# Altium PCB Amp_Lm386.PcbDoc
Units mm, origin at the board's own origin, x right, y up, seen from the top; angles counter-clockwise.
Board outline 47.75 x 47.62 mm, 2 copper layers (Top Layer, Bottom Layer); 14 components, 13 nets, 41 pads, 0 vias.
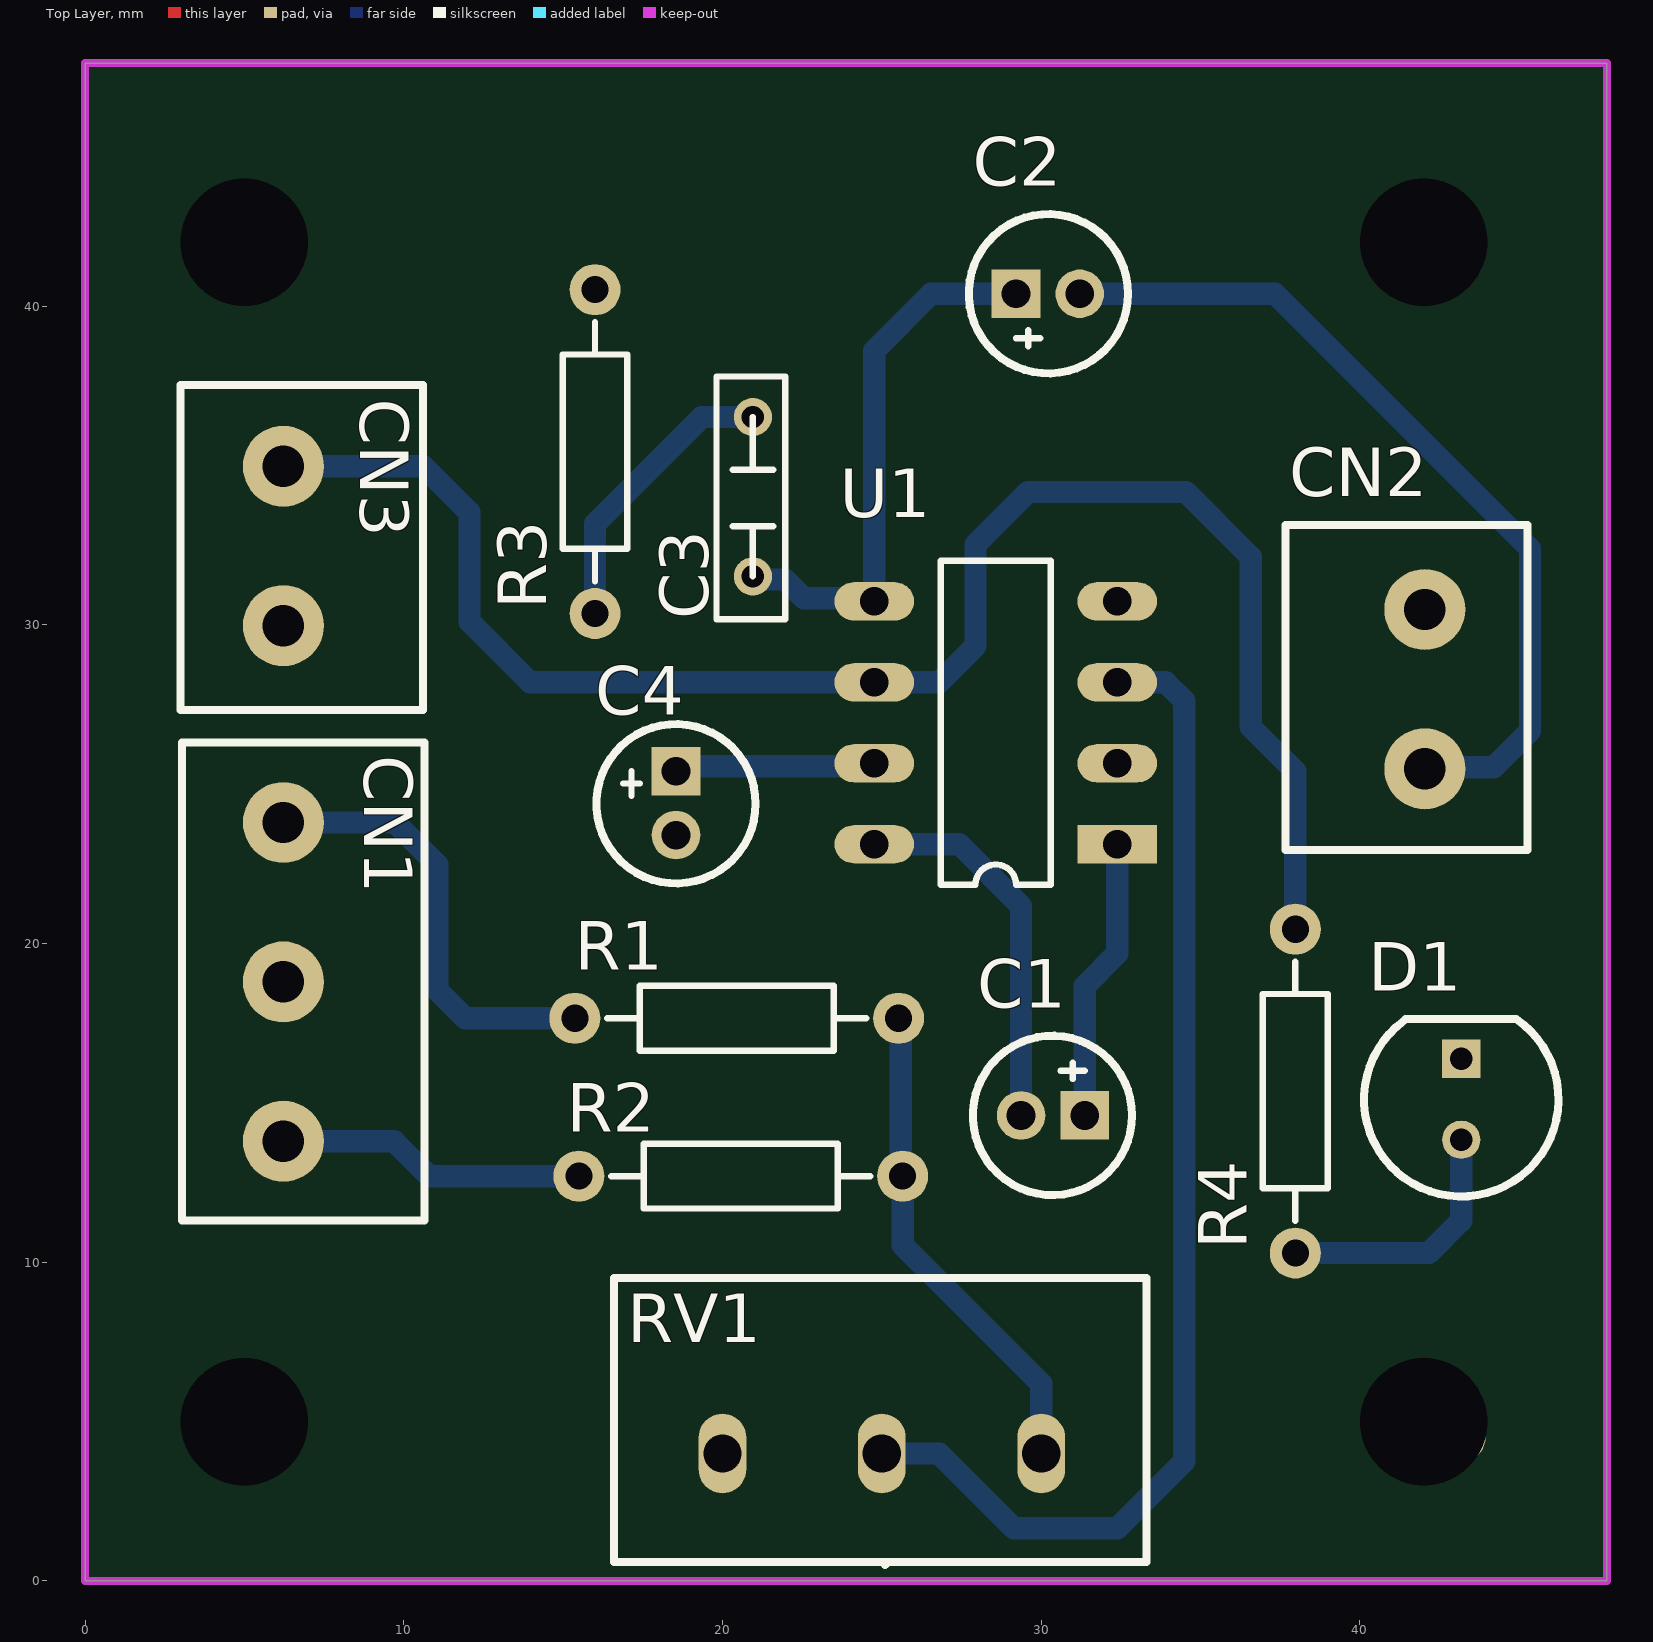
[diagram p0: Top Layer view]
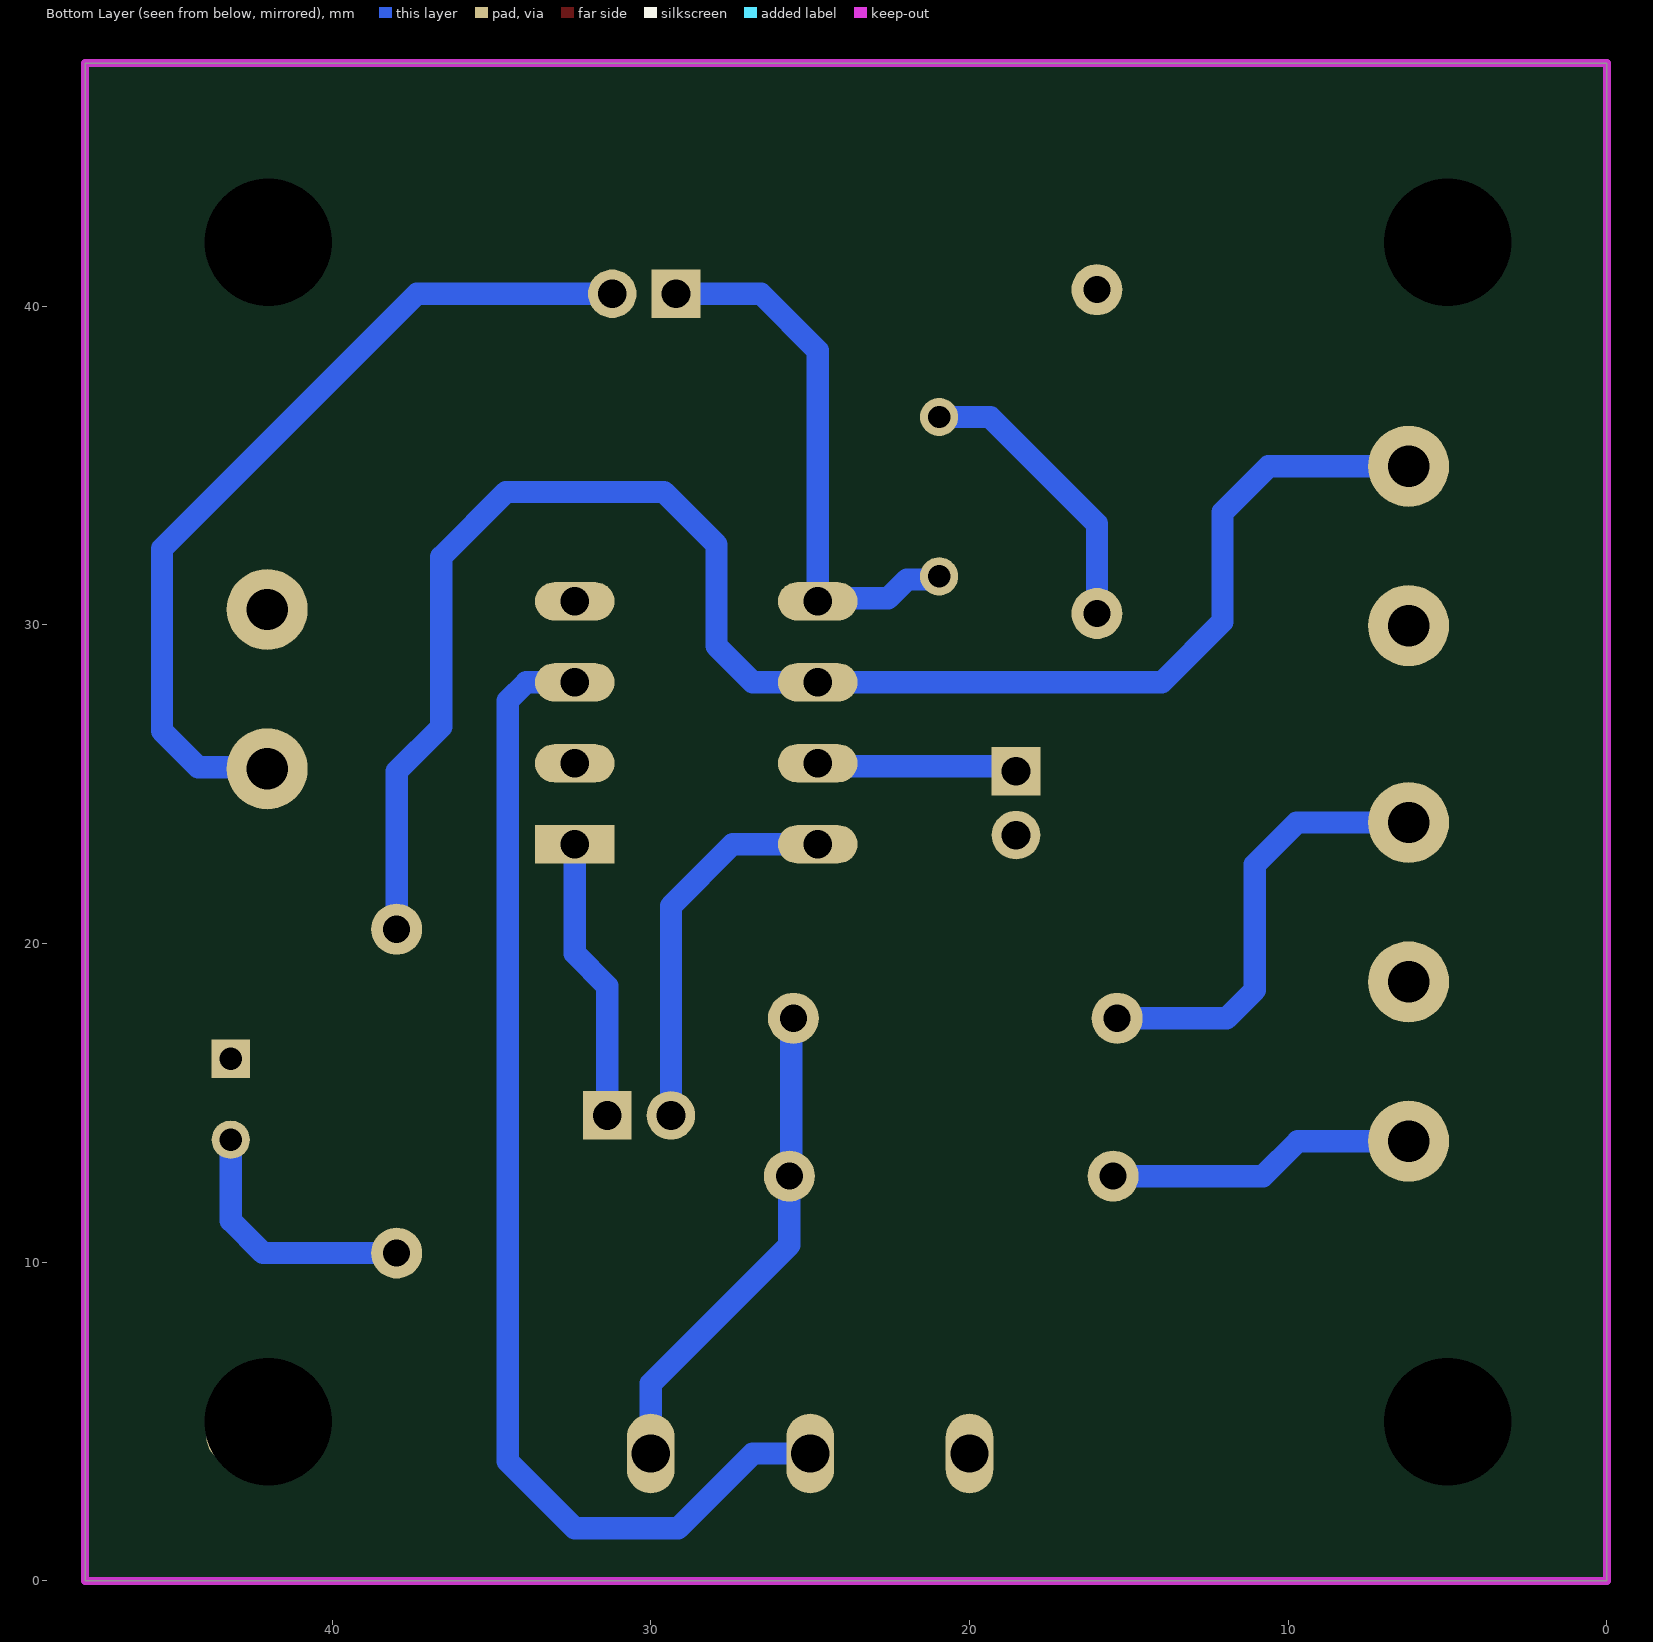
[diagram p1: Bottom Layer view, seen from below]

## Layer stack, top to bottom
Top Solder: solder mask 0.0102, Solder Resist, Dk 3.5
Top Layer: signal copper 0.0356
Dielectric 1: dielectric 0.32, FR-4, Dk 4.8
Bottom Layer: signal copper 0.0356
Bottom Solder: solder mask 0.0102, Solder Resist, Dk 3.5

## Board outline
0,0 0,47.625 47.752,47.625 47.752,0

## Design rules (kind name [scope] priority, off if disabled: settings)
Clearance [All] p1: gap=0.5 ignorepadtopadclearanceinfootprint=TRUE
HoleSize [All] p1: absolutevalues=TRUE maxlimit=5 minlimit=0.025 maxpercent=80.000 minpercent=20.000
PolygonConnect [All] p1: connectstyle=Relief reliefconductorwidth=0.5 reliefentries=4 polygonreliefangle="90 Angle" airgapwidth=0.5
RoutingVias [All] p1: holewidth=0.7 width=1.2 viastyle="Through Hole" minholewidth=0.5 minwidth=1 maxholewidth=5 maxwidth=5
SolderMaskExpansion [All] p1: expansion=0.102
Width [All] p1: maxlimit=0.7 minlimit=0.7 preferedwidth=0.7 minimp=50.000000 maximp=50.000000 favimp=50.000000
29 further rules are at their usual default settings.

## Classes and differential pairs
component class Amp_Lm386: C1 C2 C3 C4 CN1 CN2 CN3 R1 R2 RV1 U1

## Components (designator, comment, footprint, x,y, rotation, side; value= is the part's Value field where it differs from the comment)
C1 "10uF" Cap_1 31.369,14.605 r180 top
C2 "250uF" Cap_1 29.21,40.386 r0 top
C3 "100nF" CAP_DISC 20.955,36.519 r270 top
C4 "10uF" Cap_1 18.542,25.4 r270 top
CN1 "H3" H3 3.048,26.311 r270 top
CN2 "H2" H2 42.012,25.505 r90 top
CN3 "H2" H2 6.248,34.947 r270 top
D1 "LED" LED_GREEN 43.18,13.843 r90 top
R1 "1K" Resistor 27.813,20.066 r180 top
R2 "1K" Resistor 27.94,15.113 r180 top
R3 "10R" Resistor 13.589,42.799 r270 top
R4 "10K" Resistor 40.386,8.001 r90 top
RV1 "10K" "POT PTH VERTICAL" 30,4 r180 top
U1 "LM386" LM386 32.385,23.114 r180 top

## Footprints (in the part's own frame and the unit in brackets; to place one, negate y for a bottom-side part, rotate by r counter-clockwise, add the part's x,y. Pads: shape width x height; smd on the part's side, far side on the other; paste and mask are expansions set on the pad)
Cap_1 [mil]
  rect 60x60 hole 35.43: 1(0,0)
  round 60 hole 35.43: 2(78.74,0)
  silkscreen extent -58,-98 138,98, body extent -59,-99 139,99, height 454
CAP_DISC [mm]
  round 1.2 hole 0.7: 1(0,0) 2(5,0)
  silkscreen extent -1.27,-1.14 6.35,1.02, body extent -0.96,-0.85 6.04,0.85, height 7.5
H2 [mm]
  round 2.54 hole 1.3: 1(-0.025,-0.025) 2(4.975,-0.025)
  silkscreen extent -2.58,-3.25 7.62,4.35, body extent -3.08,-3.38 7.53,4.23, height 10
H3 [mm]
  round 2.54 hole 1.3: 1(2.515,3.175) 2(7.515,3.175) 3(12.515,3.175)
  silkscreen extent 0,0 15,7.6, body extent -0.59,-0.18 15.01,7.42, height 10
LED_GREEN [mm]
  round 1.2 hole 0.7: A(0,0)
  rect 1.2x1.2 hole 0.7: K(2.54,0)
  silkscreen extent -1.78,-3.05 3.79,3.05, body extent -1.73,-3 3.77,3, height 9.94
LM386 [mm]
  rect 2.5x1.2 hole 0.9: 1(0,0)
  oval 2.5x1.2 hole 0.9: 2(0,-2.54) 3(0,-5.08) 4(0,-7.62) 5(7.62,-7.62) 6(7.62,-5.08) 7(7.62,-2.54) 8(7.62,0)
  silkscreen extent 2.08,-8.89 5.54,1.27, body extent -0.04,-9.5 7.84,1.93, height 4.19
"POT PTH VERTICAL" [mm]
  oval 1.5x2.5 hole 1.2: 1(0,0) 2(5,0) 3(10,0)
  silkscreen extent -3.3,-5.5 13.4,3.5, body extent -3.5,-6.3 13.5,23.5, height 22.5
Resistor [mm]
  round 1.6 hole 0.85: 1(2.286,2.413) 2(12.446,2.413)
  silkscreen extent 3.3,1.4 11.43,3.43, body extent 1.98,1.26 12.75,3.57, height 2.93

## Part data
C1 C4: library part Cap_Eletro1, "Capacitor Electrolytic", Case/Package=Radial, Manufacturer=Nichicon, Manufacturer Part Number=UCA2G100MPD1TD, Max Operating Temperature=105°C, Min Operating Temperature=-25°C, Package Quantity=500, Ripple Current=280mA, Supplier Part Number 1=493-4771-1-ND, Tolerance=20%, Voltage Rating=400V, Capacitance=10uF, ComponentLink1Description=https://datasheet.ciiva.com/6299/e-ca-6299384.pdf, ComponentLink1URL=https://datasheet.ciiva.com/6299/e-ca-6299384.pdf, Height - Seated (Max)=0.846inch, Lead Diameter=0.6mm, Lead Free="Lead Free", Lead Pitch=0.197inch, Life (Hours)=10000Hour, Mount="Through Hole", Packaging="Tape and Reel", Pricing 1="1=0.78, 10=0.573, 100=0.3927 (USD)", Stock 1=9403, Supplier 1=Digi-Key, Termination=Radial, Voltage Rating (DC)=400V
C2: library part Cap_Eletro1, "Capacitor Electrolytic", Capacitance=10uF, Case/Package=Radial, Manufacturer=Nichicon, Manufacturer Part Number=UCA2G100MPD1TD, Max Operating Temperature=105°C, Min Operating Temperature=-25°C, Package Quantity=500, Ripple Current=280mA, Supplier Part Number 1=493-4771-1-ND, Tolerance=20%, Voltage Rating=400V, ComponentLink1Description=https://datasheet.ciiva.com/6299/e-ca-6299384.pdf, ComponentLink1URL=https://datasheet.ciiva.com/6299/e-ca-6299384.pdf, Height - Seated (Max)=0.846inch, Lead Diameter=0.6mm, Lead Free="Lead Free", Lead Pitch=0.197inch, Life (Hours)=10000Hour, Mount="Through Hole", Packaging="Tape and Reel", Pricing 1="1=0.78, 10=0.573, 100=0.3927 (USD)", Stock 1=9403, Supplier 1=Digi-Key, Termination=Radial, Voltage Rating (DC)=400V
C3: library part Capacitor_Cerâmica, "Capacitor Disc Ceramic", Case/Package=Radial, Dielectric=Y5P, Manufacturer=Multicomp, Manufacturer Part Number=MCCC100V104KY5P, Max Operating Temperature=85°C, Min Operating Temperature=-30°C, Supplier Part Number 1=1600815, Tolerance=10%, Voltage Rating=100V, Capacitance=100nF, ComponentLink1Description=http://www.farnell.com/datasheets/1523828.pdf, ComponentLink1URL=http://www.farnell.com/datasheets/1523828.pdf, Number of Pins=2, Pricing 1="1=0.751, 10=0.343, 100=0.285, 500=0.2, 1000=0.172, 5000=0.15, 10000=0.134 (GBP)", REACH SVHC=Unknown, Stock 1=2845, Supplier 1=Farnell, Voltage Rating (DC)=100V
CN1: "KRE2/WD-128 3T", Colour=Blue, Current=15A, Flammability Rating="UL94 V-0", Manufacturer="On-Shore Technology", Manufacturer Part Number=OSTTA034163, Max Operating Temperature=105°C, Max Voltage Rating (AC)=300V, Min Operating Temperature=-30°C, Supplier Part Number 1=ED2581-ND, ComponentLink1Description=https://datasheet.ciiva.com/19454/152355-19454564.pdf, ComponentLink1URL=https://datasheet.ciiva.com/19454/152355-19454564.pdf, ComponentLink2Description=https://datasheet.ciiva.com/823/osttaxx4163-823578.pdf, ComponentLink2URL=https://datasheet.ciiva.com/823/osttaxx4163-823578.pdf, Contact Material=Brass,Steel, Contact Plating=Tin,Zinc, Depth=9mm, Height=13mm, Housing Colour=Blue, Housing Material=Thermoplastic, Lead Free="Contains Lead", Length=15.94mm, Max Current Rating=15A, Mount="Through Hole", Number of Contacts=3, Number of Levels=1, Number of Positions=3, Number of Positions Per Level=3, Number of Rows=1, Orientation=Straight, Packaging=Bulk, Pitch=0.2inch, Plating=Steel,Zinc, Pricing 1="1=1.08, 10=0.674, 25=0.5768, 50=0.5184, 100=0.5076, 250=0.432, 500=0.4104, 1000=0.3672, 5000=0.2873 (USD)", Stock 1=12938, Supplier 1=Digi-Key, Termination=Screw, Voltage=300V, Width=9mm, Wire Gauge (Max)=22AWG, Wire Gauge (Min)=14AWG
CN2 CN3: "KRE2/WD-128 2T", Colour=Blue, Current=15A, Flammability Rating="UL94 V-0", Manufacturer="On-Shore Technology", Manufacturer Part Number=OSTTA024163, Max Operating Temperature=105°C, Max Voltage Rating (AC)=300V, Min Operating Temperature=-30°C, Supplier Part Number 1=ED2580-ND, ComponentLink1Description=https://datasheet.ciiva.com/19454/152347-19454562.pdf, ComponentLink1URL=https://datasheet.ciiva.com/19454/152347-19454562.pdf, ComponentLink2Description=https://datasheet.ciiva.com/823/osttaxx4163-823567.pdf, ComponentLink2URL=https://datasheet.ciiva.com/823/osttaxx4163-823567.pdf, Contact Material=Brass,Steel, Contact Plating=Tin,Zinc, Depth=9mm, Height=13mm, Housing Colour=Blue, Housing Material=Thermoplastic, Lead Free="Lead Free", Length=10.86mm, Max Current Rating=15A, Mount="Through Hole", Number of Contacts=2, Number of Levels=1, Number of Positions=2, Number of Positions Per Level=2, Number of Rows=1, Orientation=Straight, Packaging=Bulk, Pitch=0.2inch, Plating=Steel,Zinc, Pricing 1="1=0.73, 10=0.452, 25=0.3872, 50=0.348, 100=0.3408, 250=0.29, 500=0.2755, 1000=0.2465, 5000=0.1929 (USD)", Stock 1=26493, Supplier 1=Digi-Key, Termination=Screw, Voltage=300V, Width=9mm, Wire Gauge (Max)=22AWG, Wire Gauge (Min)=14AWG
D1: library part LED-GREEN, "Light Emissor Diode - 5mm", Case/Package=Radial, Colour=Green, Forward Current=25mA, Forward Voltage=1.9V, Manufacturer=Kingbright, Manufacturer Part Number=WP7113LGD, Max Operating Temperature=85°C, Min Operating Temperature=-40°C, Package Quantity=1000, Supplier Part Number 1=754-1265-ND, Test Current=2mA, ComponentLink1Description=https://datasheet.ciiva.com/16510/wp7113lgd-16510240.pdf, ComponentLink1URL=https://datasheet.ciiva.com/16510/wp7113lgd-16510240.pdf, ComponentLink2Description=https://datasheet.ciiva.com/4692/wp7113lgd-83708-4692822.pdf, ComponentLink2URL=https://datasheet.ciiva.com/4692/wp7113lgd-83708-4692822.pdf, ComponentLink3Description=https://datasheet.ciiva.com/14604/70062982-14604412.pdf, ComponentLink3URL=https://datasheet.ciiva.com/14604/70062982-14604412.pdf, ComponentLink4Description=https://datasheet.ciiva.com/2114/wp7113lgd-2114397.pdf, ComponentLink4URL=https://datasheet.ciiva.com/2114/wp7113lgd-2114397.pdf, Dominant Wavelength=568nm, Height=8.6mm, Illumination Colour=Green, Lead Free="Lead Free", Lens Colour=Green, Lens Style=Round,Diffused,Tinted, Luminous Intensity=2mcd, Mount="Through Hole", Packaging=Bulk, Pricing 1="1=0.48, 10=0.342, 25=0.2624, 100=0.171, 250=0.1254, 500=0.1064, 1000=0.0874, 2500=0.076, 5000=0.0684 (USD)", Stock 1=193634, Supplier 1=Digi-Key, Viewing Angle=30°
R1 R2 R3 R4: library part Resistor, "Carbon Fiber 1/4W", Case/Package=Conformal, Manufacturer="Stackpole Electronics", Manufacturer Part Number=CF14JT10K0, Max Operating Temperature=155°C, Max Power Dissipation=250mW, Min Operating Temperature=-55°C, Package Quantity=1, Resistance=10kR, Supplier Part Number 1=CF14JT10K0CT-ND, Temperature Coefficient=-500ppm/°C, Tolerance=5%, ComponentLink1Description=https://www.verical.com/server-webapp/html/getDatasheet?partID=367360, ComponentLink1URL=https://www.verical.com/server-webapp/html/getDatasheet?partID=367360, ComponentLink2Description=https://www.seielect.com/catalog/SEI-CF_CFM.pdf, ComponentLink2URL=https://www.seielect.com/catalog/SEI-CF_CFM.pdf, ComponentLink3Description=http://www.seielect.com/Catalog/SEI-CF_CFM.pdf, ComponentLink3URL=http://www.seielect.com/Catalog/SEI-CF_CFM.pdf, ComponentLink4Description=http://components.arrow.com/part/dataview/27619991S9848636N1174, ComponentLink4URL=http://components.arrow.com/part/dataview/27619991S9848636N1174, Composition="Carbon Film", Contact Plating=Tin,Matte, Diameter=2.3mm, Lead Free="Lead Free", Length=6.5mm, Military Standard=Not, Mount="Through Hole,Axial", Number of Terminations=2, Packaging="Tape and Reel", Power Rating=250mW, Pricing 1="1=0.1, 10=0.04, 25=0.0288, 50=0.022, 100=0.0162, 250=0.0124, 500=0.0099, 1000=0.0073 (USD)", Radiation Hardening=No, Stock 1=864013, Supplier 1=Digi-Key, Termination=Axial
RV1: library part "Potentiometer PTH Verticacl", "Potentiometer PTH Verticacl"
U1: "Amp mono"

## Free pads (board coordinates)
  round 1.524 hole 0.762: 2(43.18,4.5)
  round 1.524 hole 4: 3(5,5) 3(5,42) 3(42,5) 3(42,42)

## Nets (pads, with @x,y where several pads share a name; then routed paths per layer and width w, separated by ;. In a path a pad name is that pad's centre, name@x,y a point inside that pad or via, vN(x,y) a via of type N, cw(c..) or ccw(c..) an arc to the next point about the centre after c; other vN are vias at no path point)
GND: C4.2 CN1.2 CN2.2 CN3.2 D1.K pad.2 R3.1 RV1.3 U1.2 U1.4
NetC1_1: C1.1 U1.1 | length 8.9
  Bottom Layer w0.7: C1.1 31.369,18.669 32.385,19.685 U1.1
NetC1_2: C1.2 U1.8 | length 12
  Bottom Layer w0.7: U1.8 27.432,23.114 29.369,21.177 C1.2
NetC2_1: C2.1 C3.2 U1.5 | length 17.2
  Bottom Layer w0.7: C3.2 21.051,31.423 21.963,31.423 22.556,30.83 24.669,30.83 U1.5 24.765,38.608 26.543,40.386 C2.1
NetC2_2: C2.2 CN2.1 | length 27
  Bottom Layer w0.7: C2.2 37.338,40.386 45.339,32.385 45.339,26.67 44.196,25.527 42.084,25.527 CN2.1
NetC3_1: C3.1 R3.2 | length 9.2
  Bottom Layer w0.7: R3.2 16.002,33.166 19.354,36.519 C3.1
NetC4_1: C4.1 U1.7 | length 6.3
  Bottom Layer w0.7: C4.1 18.7,25.558 24.669,25.558 U1.7
NetCN1_1: CN1.1 R1.2 | length 14
  Bottom Layer w0.7: CN1.1 9.732,23.796 11.049,22.479 11.049,18.542 11.938,17.653 R1.2
NetCN1_3: CN1.3 R2.2 | length 9.7
  Bottom Layer w0.7: CN1.3 9.699,13.796 10.795,12.7 R2.2
NetD1_A: D1.A R4.1 | length 8.2
  Bottom Layer w0.7: R4.1 42.164,10.287 43.18,11.303 D1.A
NetR1_1: R1.1 R2.1 RV1.1 | length 15.5
  Bottom Layer w0.7: R1.1 25.59,17.59 25.59,12.763 R2.1 25.654,10.541 30,6.195 RV1.1
NetRV1_2: RV1.2 U1.3 | length 37.5
  Bottom Layer w0.7: RV1.2 26.8,4 29.149,1.651 32.385,1.651 34.485,3.751 34.485,27.618 33.909,28.194 U1.3
VCC: CN3.1 R4.2 U1.6 | length 52.6
  Bottom Layer w0.7: CN3.1 10.621,34.972 12.065,33.528 12.065,30.099 13.97,28.194 U1.6 26.797,28.194 27.94,29.337 27.94,32.512 29.591,34.163 34.544,34.163 36.576,32.131 36.576,26.797 37.973,25.4 R4.2

## Polygon pours and split planes (outlines as drawn)
GND on Bottom Layer "GND_L02_P000" (solid, remove dead copper, pour order 0): 0,0 0,47.625 47.752,47.625 47.752,0

## Keep-outs
Keep-Out Layer:
  the board outline again, w0.254